# Altium PCB controller_V1.0.PcbDoc (part 3 of 8)
Units mm, origin at the board's own origin, x right, y up, seen from the top; angles counter-clockwise.
Board outline 284.13 x 175.13 mm, 4 copper layers (Top Layer, GND, VCC, Bottom Layer); 496 components, 415 nets, 1682 pads, 750 vias.
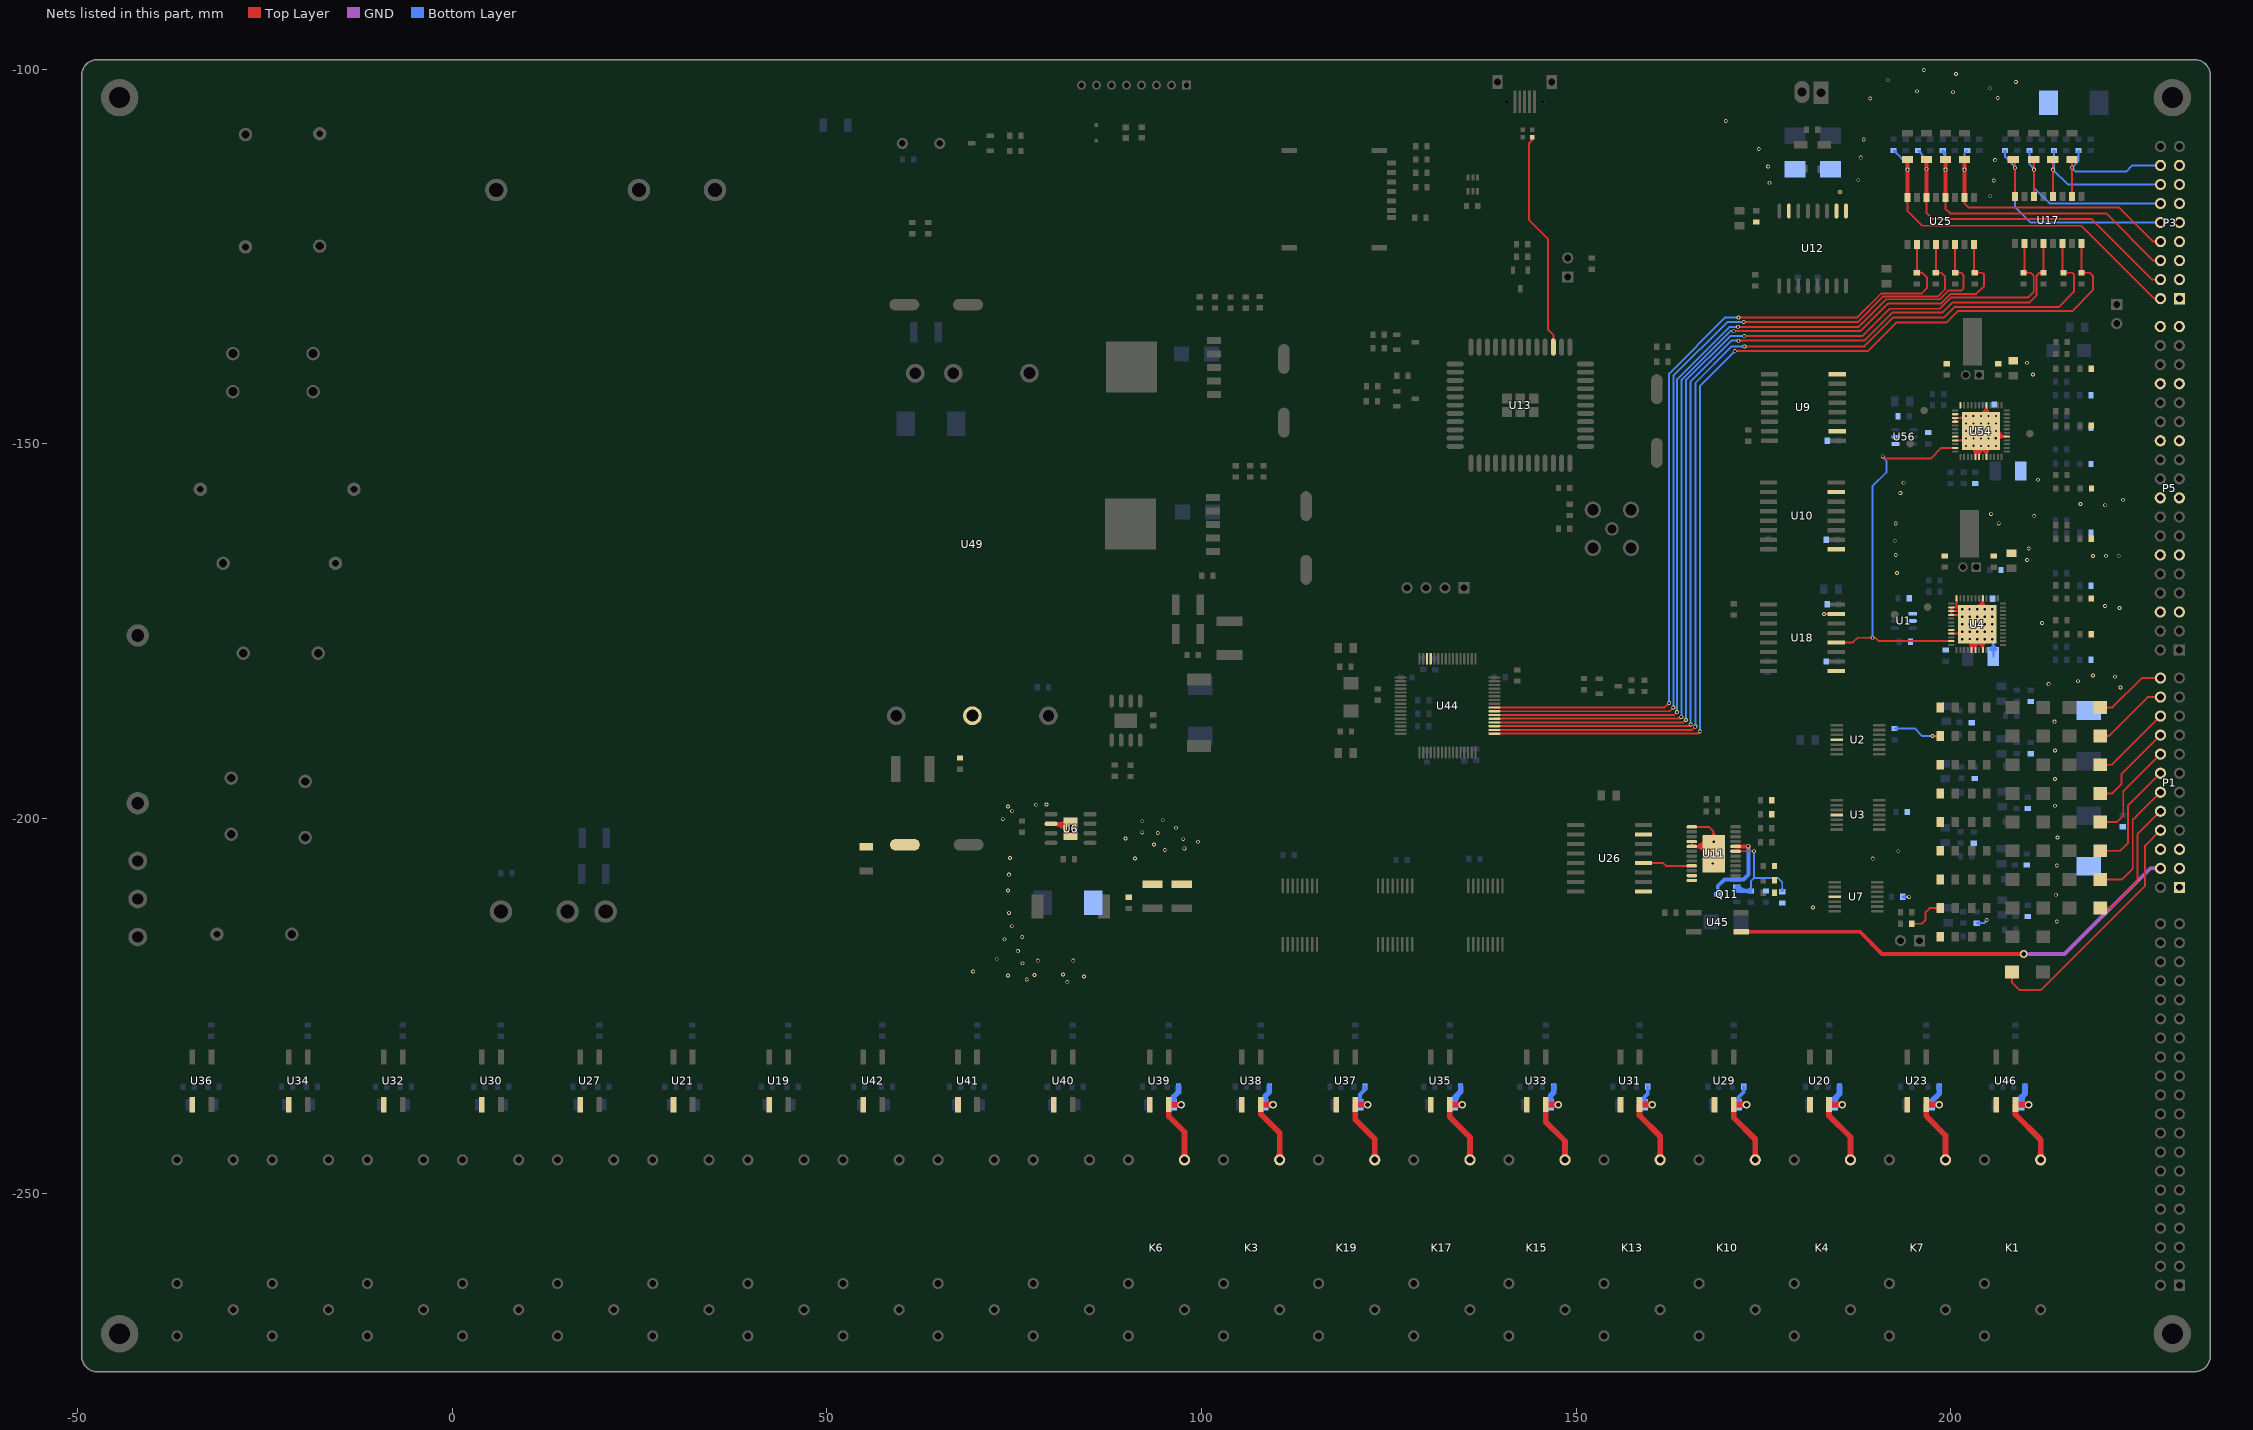
[diagram p5: the nets of this part, all layers, seen from the top]

## Via types
v1: diameter 0.508, hole 0.305, Top Layer to Bottom Layer, tented both sides, 596 vias
v2: diameter 1.016, hole 0.635, Top Layer to Bottom Layer, tented both sides, 65 vias
v3: diameter 0.6, hole 0.3, Top Layer to Bottom Layer, 50 vias
v4: diameter 0.762, hole 0.508, Top Layer to Bottom Layer, tented both sides, 29 vias
v5: diameter 2.032, hole 1.524, Top Layer to Bottom Layer, tented both sides, 4 vias
v6: diameter 3.048, hole 2.032, Top Layer to Bottom Layer, tented both sides, 3 vias
v7: diameter 1.5, hole 1, Top Layer to Bottom Layer, 2 vias
v8: diameter 2.54, hole 1.778, Top Layer to Bottom Layer, tented both sides, 1 vias

## Nets (pads, with @x,y where several pads share a name; then routed paths per layer and width w, separated by ;. In a path a pad name is that pad's centre, name@x,y a point inside that pad or via, vN(x,y) a via of type N, cw(c..) or ccw(c..) an arc to the next point about the centre after c; other vN are vias at no path point) (continued)
AGND: C1.2 C2.1 C6.1 C7.1 C8.1 C16.1 C17.1 C25.1 C26.1 C33.1 C34.1 C36.1 C37.1 C38.2 C39.2 C40.1 C43.2 C46.1 C47.1 C48.2 C49.1 C54.1 C58.1 C59.2 C62.1 C67.2 C68.2 C84.1 C85.1 C86.1 C112.1 C121.1 C133.1 C138.1 C151.2 C153.2 C156.2 C157.1 C159.2 C160.1 C162.2 C164.1 C165.1 C167.1 D4.1 D52.1 D75.1 D76.1 D78.1 D79.1 E13.2 E14.2 E138.2 P1.1 P1.3 P1.5 P1.6 P3.1 P3.3 P3.5 P3.7 P3.9 P3.11 P3.13 P3.15 P5.5 P5.6 P5.11 P5.12 P5.17 P5.18 P5.23 P5.24 P5.29 P5.30 P5.35 P5.36 R6.1 R12.1 R14.1 R18.1 R23.1 R28.1 R33.1 R35.1 R38.1 R71.2 R89.1 R198.1 R199.1 R200.1 R201.1 R210.1 R211.1 R212.1 R213.1 R222.1 R223.1 R224.1 R225.1 U1.1 U1.2 U2.11 U3.11 U4.5 U4.12 U4.14 U4.15 U4.16 U4.20 U4.21 U4.29 U4.30 U4.32 U4.49 U6.6 U6.9 U7.11 U9.2 U9.8 U10.9 U10.15 U11.1 U11.4 U11.5 U11.11 U11.12 U11.25 U12.9 U12.10 U12.15 U18.9 U18.15 U19.3 U20.3 U21.3 U23.3 U26.9 U26.15 U27.3 U29.3 U30.3 U31.3 U32.3 U33.3 U34.3 U35.3 U36.3 U37.3 U38.3 U39.3 U40.3 U41.3 U42.3 U46.3 U49.5 U54.5 U54.12 U54.14 U54.15 U54.16 U54.20 U54.21 U54.29 U54.30 U54.32 U54.41 U54.49 U56.1 U56.2 | length 264.9
  Top Layer w0.254: U6.9@81.887,-200.711 v7(82.522,-201.346) ; U11.5@165.38,-203.654 ccw(c165.212,-203.487) 165.449,-203.487 ccw(c165.686,-203.487) U11.5@165.518,-203.654 ; U11.4@165.38,-203.143 cw(c165.212,-203.31) 165.449,-203.31 cw(c165.686,-203.31) U11.4@165.518,-203.143 ; U11.4@165.449,-203.074 U11.5@165.449,-203.724 ; U11.1@165.449,-201.124 167.697,-201.124 168.374,-201.8 ; U11.5@165.981,-203.724 ccw(c165.981,-201.767) U11.25@167.503,-202.996 ; U11.5@166,-203.724 cw(c166,-205.727) U11.25@167.523,-204.426 ; U11.5@166.018,-203.793 cw(c166.186,-203.96) 166.186,-203.724 cw(c166.186,-203.487) U11.5@166.018,-203.654 ; U11.1@166.018,-201.193 cw(c166.186,-201.36) 166.186,-201.124 cw(c166.186,-200.887) U11.1@166.018,-201.054 ; 166.512,-203.724 ccw(c166.512,-202.196) U11.25@167.701,-203.155 ; 166.551,-203.724 cw(c166.551,-205.256) U11.25@167.716,-204.261 ; U11.25@167.306,-202.836 cw(c165.449,-201.338) U11.5@165.449,-203.724 ; U11.25@167.33,-204.591 ccw(c165.449,-206.198) U11.5@165.449,-203.724 ; U11.25@167.399,-203.724 U11.5@165.449,-203.724 ; U11.25@167.944,-202.395 ccw(c167.748,-201.8) 168.374,-201.8 ; U11.25@168.024,-202.636 ccw(c167.864,-202.152) 168.374,-202.152 ccw(c168.884,-202.152) U11.25@168.724,-202.636 ; v1(168.374,-204.699) 168.374,-201.8 ; U11.25@168.804,-202.395 cw(c169,-201.8) 168.374,-201.8 ; v1(183.083,-172.695) U18.15@184.732,-172.695 ; v1@183.173,-172.784 cw(c183.39,-173.001) 183.39,-172.695 cw(c183.39,-172.388) v1@183.173,-172.605 ; U18.15@183.748,-172.802 ccw(c183.487,-173.063) 183.487,-172.695 ccw(c183.487,-172.327) U18.15@183.748,-172.587 ; R23.1@194.818,-214.046 196.139,-214.046 196.647,-213.538 196.647,-212.496 197.188,-211.956 R35.1@198.625,-211.956 ; R23.1@194.976,-214.203 cw(c195.356,-214.584) 195.356,-214.046 cw(c195.356,-213.507) R23.1@194.976,-213.888 ; v1(197.588,-189) R6.1@198.625,-189 ; v1@197.678,-189.09 cw(c197.894,-189.307) 197.894,-189 cw(c197.894,-188.694) v1@197.678,-188.91 ; R35.1@198.362,-212.219 ccw(c197.725,-212.856) 197.725,-211.956 ccw(c197.725,-211.055) R35.1@198.362,-211.692 ; R6.1@198.362,-189.264 ccw(c197.725,-189.901) 197.725,-189 ccw(c197.725,-188.1) R6.1@198.362,-188.737 ; U4.21@200.095,-175.316 202.295,-175.316 cw(c202.295,-174.613) U4.49@201.693,-174.977 ; 200.524,-175.316 ccw(c200.524,-174.045) U4.49@201.423,-174.944 ; 200.524,-172.816 cw(c200.524,-174.087) U4.49@201.423,-173.189 ; 200.524,-172.316 ccw(c200.524,-171.045) U4.49@201.423,-171.944 ; 200.524,-171.816 cw(c200.524,-173.087) U4.49@201.423,-172.189 ; U54.21@200.603,-149.535 202.803,-149.535 cw(c202.803,-148.832) U54.49@202.201,-149.196 ; U54.16@200.603,-147.035 U54.15@200.603,-146.535 U54.49@202.303,-146.535 ; 200.713,-175.316 cw(c200.713,-176.898) U4.49@201.832,-175.78 ; 200.713,-172.816 ccw(c200.713,-171.234) U4.49@201.832,-172.353 ; 200.795,-171.748 U4.12@200.795,-170.616 ; 201.032,-149.535 ccw(c201.032,-148.264) U54.49@201.931,-149.163 ; 201.032,-146.535 ccw(c201.032,-145.264) U54.49@201.931,-146.163 ; U4.49@201.137,-175.316 ccw(c201.137,-174.658) U4.49@201.602,-175.123 ; U4.49@201.137,-172.816 cw(c201.137,-173.474) U4.49@201.602,-173.009 ; U4.49@201.137,-172.316 ccw(c201.137,-171.658) U4.49@201.602,-172.123 ; U4.49@201.137,-171.816 cw(c201.137,-172.474) U4.49@201.602,-172.009 ; 201.221,-149.535 cw(c201.221,-151.117) U54.49@202.34,-149.999 ; U4.49@201.258,-175.239 ccw(c201.394,-175.157) U4.49@201.394,-175.316 ; U4.49@201.258,-172.893 cw(c201.394,-172.975) U4.49@201.394,-172.816 ; U4.49@201.295,-171.816 U4.14@200.095,-171.816 U4.15@200.095,-172.316 ; U4.49@201.476,-175.108 ccw(c201.845,-174.885) U4.49@201.845,-175.316 ; U4.49@201.476,-173.024 cw(c201.845,-173.247) U4.49@201.845,-172.816 ; U4.49@201.524,-175.316 ccw(c201.524,-174.045) U4.49@202.423,-174.944 ; U4.49@201.524,-172.816 cw(c201.524,-174.087) U4.49@202.423,-173.189 ; U54.49@201.645,-149.535 ccw(c201.645,-148.877) U54.49@202.11,-149.342 ; U54.49@201.645,-146.535 ccw(c201.645,-145.877) U54.49@202.11,-146.342 ; U4.49@201.693,-173.156 cw(c202.295,-173.52) 202.295,-172.816 U4.16@200.095,-172.816 U4.15@200.095,-172.316 ; U4.49@201.75,-175.316 ccw(c201.75,-175.271) U4.49@201.782,-175.303 ; U4.49@201.75,-172.816 cw(c201.75,-172.861) U4.49@201.782,-172.829 ; U4.49@201.75,-172.316 ccw(c201.75,-172.271) U4.49@201.782,-172.303 ; U54.49@201.766,-149.458 ccw(c201.902,-149.376) U54.49@201.902,-149.535 ; U4.49@201.795,-172.316 U4.15@200.095,-172.316 ; U54.49@201.984,-149.327 ccw(c202.353,-149.104) U54.49@202.353,-149.535 ; U4.49@202.011,-175.942 cw(c200.657,-177.597) 202.795,-177.597 cw(c203.923,-177.597) U4.49@203.803,-176.475 ; U54.49@202.032,-149.535 ccw(c202.032,-148.264) U54.49@202.931,-149.163 ; U4.49@202.137,-175.316 ccw(c202.137,-174.658) U4.49@202.602,-175.123 ; U4.49@202.137,-172.816 cw(c202.137,-173.474) U4.49@202.602,-173.009 ; U4.49@202.172,-175.745 cw(c201.095,-177.061) 202.795,-177.061 ; U54.49@202.258,-149.535 ccw(c202.258,-149.49) U54.49@202.29,-149.522 ; U54.49@202.258,-146.535 ccw(c202.258,-146.49) U54.49@202.29,-146.522 ; U4.49@202.332,-175.548 cw(c201.534,-176.525) U4.49@202.795,-176.525 ; U4.49@202.423,-176.159 cw(c201.524,-177.057) 202.795,-177.057 ; U4.49@202.423,-175.914 ccw(c201.524,-175.015) U4.49@202.795,-175.015 ; U4.49@202.423,-175.189 cw(c201.524,-176.087) U4.49@202.795,-176.087 ; U4.49@202.493,-176.249 cw(c201.879,-177.525) 203.295,-177.525 cw(c204.447,-177.525) U4.49@204.156,-176.411 ; U54.49@202.519,-150.161 cw(c201.165,-151.816) 203.303,-151.816 cw(c204.431,-151.816) U54.49@204.311,-150.694 ; U4.49@202.545,-174.893 ccw(c202.545,-174.476) 202.84,-174.771 ccw(c203.136,-175.066) U4.49@202.718,-175.066 ; U4.49@202.602,-176.093 ccw(c202.137,-175.628) U4.49@202.795,-175.628 ; U4.49@202.602,-175.979 cw(c202.137,-176.444) U4.49@202.795,-176.444 ; U4.49@202.602,-175.009 cw(c202.137,-175.474) U4.49@202.795,-175.474 ; U4.49@202.604,-176.02 cw(c202.073,-177.121) U4.30@203.295,-177.121 ; U54.49@202.645,-149.535 ccw(c202.645,-148.877) U54.49@203.11,-149.342 ; U54.49@202.68,-149.964 cw(c201.603,-151.28) 203.303,-151.28 ; U4.49@202.714,-175.791 cw(c202.268,-176.716) 203.295,-176.716 ; U4.49@202.782,-176.273 ccw(c202.75,-176.241) U4.49@202.795,-176.241 ; U4.49@202.782,-175.799 cw(c202.75,-175.831) U4.49@202.795,-175.831 ; U4.49@202.782,-174.829 cw(c202.75,-174.861) U4.49@202.795,-174.861 ; U4.29@202.795,-177.516 202.795,-174.816 v3(203.545,-174.066) ; U4.29@202.795,-177.314 cw(c203.892,-177.314) U4.49@203.776,-176.223 ; 202.795,-177.031 cw(c203.862,-177.031) U4.49@203.749,-175.97 ; 202.795,-176.749 cw(c203.832,-176.749) U4.49@203.722,-175.718 ; U54.49@202.84,-149.767 cw(c202.042,-150.744) U54.49@203.303,-150.744 ; U54.49@202.931,-150.378 cw(c202.032,-151.276) 203.303,-151.276 ; U54.49@202.931,-150.133 ccw(c202.032,-149.234) U54.49@203.303,-149.234 ; U54.49@202.931,-149.408 cw(c202.032,-150.306) U54.49@203.303,-150.306 ; U54.49@203.001,-150.468 cw(c202.387,-151.744) 203.803,-151.744 cw(c204.955,-151.744) U54.49@204.664,-150.63 ; U54.49@203.11,-150.312 ccw(c202.645,-149.847) U54.49@203.303,-149.847 ; U54.49@203.11,-150.198 cw(c202.645,-150.663) U54.49@203.303,-150.663 ; U54.49@203.11,-149.228 cw(c202.645,-149.693) U54.49@203.303,-149.693 ; U54.49@203.112,-150.239 cw(c202.581,-151.34) U54.30@203.803,-151.34 ; U54.49@203.222,-150.01 cw(c202.776,-150.935) 203.803,-150.935 ; U4.49@203.287,-176.475 cw(c203.167,-177.597) 204.295,-177.597 cw(c206.433,-177.597) U4.49@205.079,-175.942 ; U54.49@203.29,-150.492 ccw(c203.258,-150.46) U54.49@203.303,-150.46 ; U54.49@203.29,-150.018 cw(c203.258,-150.05) U54.49@203.303,-150.05 ; U54.49@203.29,-149.048 cw(c203.258,-149.08) U54.49@203.303,-149.08 ; U4.30@203.295,-177.516 203.295,-174.316 ccw(c203.998,-174.316) U4.49@203.634,-174.918 ; U4.30@203.295,-177.196 cw(c204.361,-177.196) U4.49@204.092,-176.165 ; 203.295,-177.087 cw(c204.566,-177.087) U4.49@203.667,-176.189 ; 203.295,-176.868 cw(c204.275,-176.868) U4.49@204.028,-175.919 ; U4.49@203.295,-176.474 cw(c203.953,-176.474) U4.49@203.488,-176.009 ; U4.49@203.295,-176.271 ccw(c203.34,-176.271) U4.49@203.308,-176.303 ; U4.49@203.295,-176.087 cw(c204.566,-176.087) U4.49@203.667,-175.189 ; U4.49@203.295,-175.861 cw(c203.34,-175.861) U4.49@203.308,-175.829 ; U4.49@203.295,-175.658 ccw(c203.953,-175.658) U4.49@203.488,-176.123 ; U4.49@203.295,-175.474 cw(c203.953,-175.474) U4.49@203.488,-175.009 ; U4.49@203.295,-175.217 ccw(c203.454,-175.217) U4.49@203.372,-175.353 ; U4.49@203.295,-175.087 cw(c204.566,-175.087) U4.49@203.667,-174.189 ; U4.49@203.295,-175.045 ccw(c204.566,-175.045) U4.49@203.667,-175.944 ; U4.49@203.295,-174.861 cw(c203.34,-174.861) U4.49@203.308,-174.829 ; U4.49@203.295,-174.767 ccw(c203.726,-174.767) U4.49@203.503,-175.136 ; U4.49@203.295,-174.474 cw(c203.953,-174.474) U4.49@203.488,-174.009 ; U54.29@203.303,-151.735 U54.49@203.303,-149.035 ; U54.29@203.303,-151.533 cw(c204.4,-151.533) U54.49@204.284,-150.442 ; 203.303,-151.25 cw(c204.37,-151.25) U54.49@204.257,-150.189 ; 203.303,-150.968 cw(c204.34,-150.968) U54.49@204.23,-149.937 ; U4.49@203.314,-176.223 cw(c203.198,-177.314) U4.32@204.295,-177.314 ; U4.49@203.341,-175.97 cw(c203.228,-177.031) 204.295,-177.031 ; U4.49@203.343,-171.652 ccw(c203.256,-170.616) U4.5@204.295,-170.616 ccw(c206.265,-170.616) U4.49@205.045,-172.164 ; U4.49@203.364,-171.905 ccw(c203.279,-170.892) U4.5@204.295,-170.892 ; U4.49@203.368,-175.718 cw(c203.258,-176.749) 204.295,-176.749 ; U4.49@203.372,-174.066 cw(c202.954,-174.066) 203.25,-174.362 cw(c203.545,-174.657) U4.49@203.545,-174.239 ; U4.49@203.385,-172.158 ccw(c203.302,-171.169) 204.295,-171.169 ; U4.49@203.406,-172.411 ccw(c203.325,-171.445) 204.295,-171.445 ; U54.49@203.795,-150.694 cw(c203.675,-151.816) 204.803,-151.816 cw(c206.941,-151.816) U54.49@205.587,-150.161 ; U54.30@203.803,-151.735 203.803,-148.535 ccw(c204.506,-148.535) U54.49@204.142,-149.137 ; U54.30@203.803,-151.415 cw(c204.869,-151.415) U54.49@204.6,-150.384 ; 203.803,-151.306 cw(c205.074,-151.306) U54.49@204.175,-150.408 ; 203.803,-151.087 cw(c204.783,-151.087) U54.49@204.536,-150.138 ; U54.49@203.803,-150.693 cw(c204.461,-150.693) U54.49@203.996,-150.228 ; U54.49@203.803,-150.49 ccw(c203.848,-150.49) U54.49@203.816,-150.522 ; U54.49@203.803,-150.306 cw(c205.074,-150.306) U54.49@204.175,-149.408 ; U54.49@203.803,-150.08 cw(c203.848,-150.08) U54.49@203.816,-150.048 ; U54.49@203.803,-149.877 ccw(c204.461,-149.877) U54.49@203.996,-150.342 ; U54.49@203.803,-149.693 cw(c204.461,-149.693) U54.49@203.996,-149.228 ; U54.49@203.803,-149.436 ccw(c203.962,-149.436) U54.49@203.88,-149.572 ; U54.49@203.803,-149.306 cw(c205.074,-149.306) U54.49@204.175,-148.408 ; U54.49@203.803,-149.264 ccw(c205.074,-149.264) U54.49@204.175,-150.163 ; U54.49@203.803,-149.08 cw(c203.848,-149.08) U54.49@203.816,-149.048 ; U54.49@203.803,-148.986 ccw(c204.234,-148.986) U54.49@204.011,-149.355 ; U54.49@203.803,-148.693 cw(c204.461,-148.693) U54.49@203.996,-148.228 ; U54.49@203.822,-150.442 cw(c203.706,-151.533) U54.32@204.803,-151.533 ; U54.49@203.849,-150.189 cw(c203.736,-151.25) 204.803,-151.25 ; U54.49@203.851,-145.871 ccw(c203.764,-144.835) U54.5@204.803,-144.835 ccw(c206.773,-144.835) U54.49@205.553,-146.383 ; U54.49@203.872,-146.124 ccw(c203.787,-145.111) U54.5@204.803,-145.111 ; U54.49@203.876,-149.937 cw(c203.766,-150.968) 204.803,-150.968 ; U54.49@203.893,-146.377 ccw(c203.81,-145.388) 204.803,-145.388 ; U54.49@203.914,-146.63 ccw(c203.833,-145.664) 204.803,-145.664 ; v3(204.053,-148.285) 204.803,-147.535 U54.5@204.803,-144.835 ; U54.49@204.053,-148.112 ccw(c204.053,-147.695) 204.348,-147.99 ccw(c204.644,-148.285) U54.49@204.226,-148.285 ; U4.32@204.295,-177.516 U4.49@204.295,-174.816 ; 204.295,-177.087 cw(c205.566,-177.087) U4.49@204.667,-176.189 ; 204.295,-177.061 cw(c205.995,-177.061) U4.49@204.918,-175.745 ; U4.49@204.295,-176.525 cw(c205.556,-176.525) U4.49@204.758,-175.548 ; U4.49@204.295,-176.474 cw(c204.953,-176.474) U4.49@204.488,-176.009 ; U4.49@204.295,-176.271 ccw(c204.34,-176.271) U4.49@204.308,-176.303 ; U4.49@204.295,-176.087 cw(c205.566,-176.087) U4.49@204.667,-175.189 ; U4.49@204.295,-175.861 cw(c204.34,-175.861) U4.49@204.308,-175.829 ; U4.49@204.295,-175.658 ccw(c204.953,-175.658) U4.49@204.488,-176.123 ; U4.49@204.295,-175.474 cw(c204.953,-175.474) U4.49@204.488,-175.009 ; U4.49@204.295,-175.045 ccw(c205.566,-175.045) U4.49@204.667,-175.944 ; U4.49@204.295,-174.861 cw(c204.34,-174.861) U4.49@204.308,-174.829 ; U4.49@204.295,-173.316 U4.5@204.295,-170.616 ; U4.49@204.295,-173.271 ccw(c204.34,-173.271) U4.49@204.308,-173.303 ; U4.49@204.295,-173.087 cw(c205.566,-173.087) U4.49@204.667,-172.189 ; U4.49@204.295,-172.658 ccw(c204.953,-172.658) U4.49@204.488,-173.123 ; U4.49@204.295,-172.474 cw(c204.953,-172.474) U4.49@204.488,-172.009 ; U4.49@204.295,-172.271 ccw(c204.34,-172.271) U4.49@204.308,-172.303 ; U4.49@204.295,-172.045 ccw(c205.566,-172.045) U4.49@204.667,-172.944 ; U4.49@204.295,-171.861 cw(c204.34,-171.861) U4.49@204.308,-171.829 ; U4.49@204.295,-171.658 ccw(c204.953,-171.658) U4.49@204.488,-172.123 ; 204.295,-171.14 ccw(c205.852,-171.14) U4.49@204.888,-172.363 ; 204.295,-171.045 ccw(c205.566,-171.045) U4.49@204.667,-171.944 ; U54.32@204.803,-151.735 204.803,-149.285 ccw(c206.023,-149.285) U54.49@205.173,-150.161 ; 204.803,-151.306 cw(c206.074,-151.306) U54.49@205.175,-150.408 ; 204.803,-151.28 cw(c206.503,-151.28) U54.49@205.426,-149.964 ; U54.49@204.803,-150.744 cw(c206.064,-150.744) U54.49@205.266,-149.767 ; U54.49@204.803,-150.693 cw(c205.461,-150.693) U54.49@204.996,-150.228 ; U54.49@204.803,-150.486 ccw(c204.858,-150.486) U54.49@204.82,-150.526 ; U54.49@204.803,-150.306 cw(c206.074,-150.306) 205.175,-149.408 cw(c206.074,-150.306) U54.49@206.074,-149.035 ; U54.49@204.803,-150.08 cw(c204.848,-150.08) U54.49@204.816,-150.048 ; U54.49@204.803,-149.886 ccw(c205.441,-149.886) U54.49@204.997,-150.343 ; U54.49@204.803,-149.693 cw(c205.461,-149.693) 204.996,-149.228 cw(c205.461,-149.693) U54.49@205.461,-149.035 ; U54.49@204.803,-149.035 U54.41@207.503,-149.035 ; U54.49@204.803,-147.49 ccw(c204.848,-147.49) U54.49@204.816,-147.522 ; U54.49@204.803,-147.306 cw(c206.074,-147.306) U54.49@205.175,-146.408 ; U54.49@204.803,-146.877 ccw(c205.461,-146.877) U54.49@204.996,-147.342 ; U54.49@204.803,-146.693 cw(c205.461,-146.693) U54.49@204.996,-146.228 ; U54.49@204.803,-146.49 ccw(c204.848,-146.49) U54.49@204.816,-146.522 ; U54.49@204.803,-146.264 ccw(c206.074,-146.264) U54.49@205.175,-147.163 ; U54.49@204.803,-146.08 cw(c204.848,-146.08) U54.49@204.816,-146.048 ; U54.49@204.803,-145.877 ccw(c205.461,-145.877) U54.49@204.996,-146.342 ; 204.803,-145.359 ccw(c206.36,-145.359) U54.49@205.396,-146.582 ; 204.803,-145.264 ccw(c206.074,-145.264) U54.49@205.175,-146.163 ; U54.49@204.816,-149.048 cw(c204.848,-149.08) U54.49@204.848,-149.035 ; U54.49@204.88,-147.285 cw(c204.462,-147.285) 204.758,-147.581 cw(c205.053,-147.876) U54.49@205.053,-147.458 ; U54.49@205.074,-149.035 cw(c205.074,-150.204) U54.49@205.901,-149.378 ; U54.49@205.687,-149.035 cw(c205.687,-149.591) U54.49@206.08,-149.198 ; U54.49@205.708,-148.147 ccw(c206.674,-148.066) 206.674,-149.035 ; U54.49@205.756,-149.628 cw(c206.979,-150.593) 206.979,-149.035 ; U54.49@205.956,-149.786 cw(c207.503,-151.006) U54.41@207.503,-149.035 ; U54.49@205.961,-148.125 ccw(c206.951,-148.042) 206.951,-149.035 ; U54.49@205.966,-149.198 cw(c206.359,-149.591) U54.49@206.359,-149.035 ; U54.49@206.145,-149.378 cw(c206.972,-150.204) 206.972,-149.035 ; U54.49@206.214,-148.104 ccw(c207.227,-148.019) U54.41@207.227,-149.035 ; U54.49@206.468,-148.083 ccw(c207.503,-147.996) U54.41@207.503,-149.035
  Top Layer w0.508: U6.6@80.637,-200.711 cw(c80.637,-202.681) U6.9@82.03,-201.288 ; 81.047,-200.711 ccw(c81.047,-199.321) U6.9@82.03,-200.304 ; 81.09,-200.711 cw(c81.09,-202.68) U6.9@82.531,-201.338 ; U6.9@81.887,-200.711 U6.6@79.922,-200.711 cw(c79.922,-203.769) U6.9@82.159,-201.684
  Bottom Layer w0.254: C49.1@192.507,-187.985 195.224,-187.985 196.239,-189 v1(197.588,-189) ; C49.1@192.739,-188.143 cw(c193.12,-188.524) 193.12,-187.985 cw(c193.12,-187.447) C49.1@192.739,-187.828 ; C58.1@193.599,-210.464 v1(194.462,-210.464) ; C58.1@193.756,-210.622 cw(c194.137,-211.003) 194.137,-210.464 cw(c194.137,-209.926) C58.1@193.756,-210.307 ; v1@194.373,-210.554 ccw(c194.156,-210.771) 194.156,-210.464 ccw(c194.156,-210.158) v1@194.373,-210.375 ; v1@197.498,-189.09 ccw(c197.281,-189.307) 197.281,-189 ccw(c197.281,-188.694) v1@197.498,-188.91 ; C34.1@203.479,-213.97 204.495,-213.97 v1@204.902,-213.563 ; C34.1@203.712,-214.127 cw(c204.093,-214.508) 204.093,-213.97 cw(c204.093,-213.431) C34.1@203.712,-213.812 ; 204.546,-213.919 ccw(c204.191,-213.563) v1@204.694,-213.563 ; E14.2@205.255,-177.427 ccw(c204.171,-176.343) 205.704,-176.343 ccw(c207.237,-176.343) E14.2@206.153,-177.427 ; v3@205.423,-176.189 cw(c204.743,-176.868) 205.704,-176.868 ; E14.2@205.435,-177.607 ccw(c204.784,-176.956) 205.704,-176.956 ccw(c206.624,-176.956) E14.2@205.973,-177.607 ; v3(205.545,-176.066) 205.704,-176.225 E14.2@205.704,-178.384
  other v1: 82.093,-221.844 76.683,-221.488 84.328,-221.082 74.168,-220.955 77.699,-220.878 81.509,-220.828 69.52,-220.421 76.098,-219.329 78.156,-218.973 82.88,-218.973 72.669,-218.719 75.489,-217.703 73.711,-216.129 76.073,-215.824 74.727,-214.376 214.173,-213.741 204.821,-213.563 74.32,-212.598 181.635,-211.887 214.046,-210.185 74.168,-209.601 74.295,-207.493 214.173,-206.273 168.25,-205.994 189.611,-205.359 91.135,-205.334 74.447,-205.283 193.015,-204.368 95.098,-204.216 97.714,-203.987 93.65,-203.479 99.543,-203.098 168.374,-203.098 97.561,-202.717 89.865,-202.667 214.274,-202.54 94.158,-201.93 92.1,-201.854 96.596,-201.244 92.1,-200.381 94.818,-200.228 73.482,-200.05 74.727,-199.034 74.168,-198.399 213.944,-198.298 77.927,-198.171 79.324,-198.145 213.944,-194.716 213.944,-190.932 213.868,-187.071 222.682,-182.524 213.081,-182.067 216.992,-181.686 221.945,-181.077 218.999,-180.924 212.217,-173.914 222.555,-171.907 220.624,-171.628 192.837,-167.234 210.21,-165.481 218.999,-164.973 220.726,-164.922 222.453,-164.922 192.684,-164.821 210.439,-163.957 192.532,-162.916 192.684,-160.63 206.426,-160.604 211.176,-159.639 205.41,-159.334 220.624,-158.191 217.348,-158.013 223.012,-157.455 193.294,-156.566 193.726,-155.194 211.658,-154.788 210.998,-140.741 210.185,-139.167 205.283,-116.942 185.242,-116.383 175.819,-115.138 205.765,-114.833 187.681,-114.808 175.641,-112.979 205.943,-112.116 188.011,-111.785 174.396,-110.642 188.392,-109.372 169.977,-106.909 189.281,-103.886 206.299,-103.835 200.304,-103.048 195.504,-102.921 205.232,-102.514 208.712,-101.702 191.618,-101.448 200.711,-100.635 196.418,-100.101
  other v3: 201.545,-176.066 203.545,-176.066 204.545,-176.066 202.545,-176.036 201.545,-175.066 202.545,-175.066 203.545,-175.066 204.545,-175.066 205.515,-175.036 201.545,-174.066 202.545,-174.066 204.545,-174.066 205.545,-174.066 201.545,-173.066 202.545,-173.066 203.545,-173.066 204.545,-173.066 205.545,-173.066 201.545,-172.066 202.515,-172.066 203.545,-172.066 204.545,-172.066 205.545,-172.066 202.053,-150.285 204.053,-150.285 205.053,-150.285 206.053,-150.285 203.053,-150.255 202.053,-149.285 203.053,-149.285 204.053,-149.285 205.053,-149.285 206.023,-149.255 202.053,-148.285 203.053,-148.285 205.053,-148.285 206.053,-148.285 202.053,-147.285 203.053,-147.285 204.053,-147.285 205.053,-147.285 206.053,-147.285 202.053,-146.285 203.023,-146.285 204.053,-146.285 205.053,-146.285 206.053,-146.285
AI0: D1.1 P1.24 | length 9.7
  Top Layer w0.254: D1.1@219.979,-185.174 221.607,-185.174 225.527,-181.254 P1.24@228.006,-181.254
AI1: D2.1 P1.22 | length 11.1
  Top Layer w0.254: D2.1@219.979,-189 221.083,-189 ; D2.1@220.735,-189.245 cw(c221.083,-189.37) 221.083,-189 ; D2.1@220.735,-188.756 ccw(c221.083,-188.631) 221.083,-189 ; P1.22@228.006,-183.794 226.289,-183.794 221.083,-189
AI2: D5.1 P1.20 | length 10.7
  Top Layer w0.254: D5.1@219.979,-192.826 221.515,-192.826 P1.20@228.006,-186.334
AI3: D7.1 P1.18 | length 12
  Top Layer w0.254: D7.1@219.979,-196.652 221.559,-196.652 222.783,-195.428 222.783,-194.097 P1.18@228.006,-188.874
AI4: D10.1 P1.16 | length 13.7
  Top Layer w0.254: D10.1@219.979,-200.478 222.178,-200.478 223.037,-199.619 223.037,-196.383 P1.16@228.006,-191.414
AI5: D13.1 P1.14 | length 15.3
  Top Layer w0.254: D13.1@219.979,-204.304 222.67,-204.304 223.672,-203.302 223.672,-198.288 P1.14@228.006,-193.954
AI6: D16.1 P1.12 | length 16.7
  Top Layer w0.254: D16.1@219.979,-208.13 222.908,-208.13 224.307,-206.731 224.307,-200.193 224.688,-199.812 224.849,-199.652 P1.12@228.006,-196.494
AI7: D18.1 P1.10 | length 19.8
  Top Layer w0.254: D18.1@219.979,-211.956 221.368,-211.956 ; D18.1@220.451,-212.207 cw(c220.907,-212.496) 220.907,-211.956 cw(c220.907,-211.415) D18.1@220.451,-211.705 ; D18.1@220.665,-212.343 cw(c221.368,-212.788) 221.368,-211.956 ; D18.1@220.665,-211.569 ccw(c221.368,-211.123) 221.368,-211.956 ; P1.10@228.006,-199.034 224.942,-202.098 224.942,-208.382 221.368,-211.956
AI8: D20.1 P1.8 | length 33.6
  Top Layer w0.254: D20.1@208.211,-220.497 208.211,-221.902 209.22,-222.91 212.032,-222.91 225.958,-208.984 225.958,-203.622 P1.8@228.006,-201.574
AO_0: P1.4 U45.3 | length 63.8
  Top Layer w0.508: U45.3@172.057,-215.113 187.884,-215.113 190.856,-218.084 v2(209.753,-218.084) ; v2@209.574,-218.264 ccw(c209.14,-218.698) 209.14,-218.084 ccw(c209.14,-217.471) v2@209.574,-217.905
  GND w0.508: v2(209.753,-218.084) 215.214,-218.084 226.644,-206.654 P1.4@228.006,-206.654 ; v2@209.933,-218.264 cw(c210.366,-218.698) 210.366,-218.084 cw(c210.366,-217.471) v2@209.933,-217.905
AO_BOOST: Q11.3 U11.20 | length 11.3
  Top Layer w0.508: U11.20@171.299,-203.724 v1(172.999,-203.724)
  Bottom Layer w0.508: Q11.3@168.922,-210.144 168.922,-209.03 169.824,-208.128 172.364,-208.128 172.999,-207.493 v1(172.999,-203.724)
AO_IOUT: C40.2 Q11.1 R72.1 U11.19 | length 20.9
  Top Layer w0.254: U11.19@171.299,-204.374 v1(173.756,-204.374) ; U11.19@171.868,-204.443 cw(c172.036,-204.61) 172.036,-204.374 cw(c172.036,-204.137) U11.19@171.868,-204.304 ; v1@173.666,-204.463 ccw(c173.45,-204.68) 173.45,-204.374 ccw(c173.45,-204.067) v1@173.666,-204.284
  Bottom Layer w0.254: R72.1@173.169,-209.518 ccw(c172.789,-209.137) 173.327,-209.137 ccw(c173.865,-209.137) R72.1@173.485,-209.518 ; R72.1@173.327,-209.676 173.327,-208.359 173.756,-207.93 ; v1@173.666,-204.463 cw(c173.45,-204.68) 173.756,-204.68 cw(c174.063,-204.68) v1@173.846,-204.463 ; v1(173.756,-204.374) 173.756,-207.93 ; C40.2@177.36,-209.621 ccw(c176.98,-209.24) 177.518,-209.24 ccw(c178.056,-209.24) C40.2@177.676,-209.621 ; C40.2@177.518,-209.779 177.518,-208.506 176.942,-207.93 173.756,-207.93
  Bottom Layer w0.508: 171.295,-209.47 ccw(c171.791,-208.975) 171.791,-209.676 ; Q11.1@171.422,-209.144 171.954,-209.676 R72.1@173.327,-209.676 ; Q11.1@171.655,-209.111 ccw(c173.017,-207.748) R72.1@173.017,-209.676 ; Q11.1@171.668,-209.144 ccw(c172.262,-209.144) 171.842,-209.564
DI_0: C108.2 D15.1 P3.8 U25.2 | length 39.9
  Top Layer w0.254: U25.2@201.677,-117.504 cw(c201.367,-117.876) 201.851,-117.876 ; U25.2@201.851,-117.094 201.851,-117.876 ; U25.2@202.026,-117.504 ccw(c202.335,-117.876) 201.851,-117.876 ; P3.8@227.448,-123.243 ccw(c227.051,-123.423) 227.051,-122.987 ; P3.8@227.448,-122.73 cw(c227.051,-122.551) 227.051,-122.987 ; P3.8@228.016,-122.987 227.051,-122.987 ; 201.851,-117.876 202.441,-118.466 222.529,-118.466 227.051,-122.987
  Top Layer w0.508: D15.1@201.715,-112.175 cw(c201.381,-112.51) 201.854,-112.51 cw(c202.327,-112.51) D15.1@201.992,-112.175 ; U25.2@201.854,-117.091 D15.1@201.854,-112.037
  Bottom Layer w0.254: v1@201.764,-113.296 ccw(c201.547,-113.079) 201.854,-113.079 ccw(c202.16,-113.079) v1@201.944,-113.296 ; v1(201.854,-113.386) 201.854,-111.166 C108.2@202.199,-110.822
DI_1: C56.2 D39.1 P3.6 U25.4 | length 46.2
  Top Layer w0.254: U25.4@199.118,-117.487 cw(c198.652,-117.953) 199.311,-117.953 cw(c199.97,-117.953) U25.4@199.504,-117.487 ; U25.4@199.311,-117.094 199.311,-118.615 199.923,-119.228 220.751,-119.228 227.051,-125.527 ; P3.6@227.448,-125.783 ccw(c227.051,-125.963) 227.051,-125.527 ; P3.6@227.448,-125.27 cw(c227.051,-125.091) 227.051,-125.527 ; P3.6@228.016,-125.527 227.051,-125.527
  Top Layer w0.508: D39.1@199.175,-112.175 cw(c198.841,-112.51) 199.314,-112.51 cw(c199.787,-112.51) D39.1@199.452,-112.175 ; U25.4@199.314,-117.091 D39.1@199.314,-112.037
  Bottom Layer w0.254: C56.2@198.843,-110.979 cw(c197.706,-112.116) 199.314,-112.116 ; C56.2@198.926,-110.822 199.314,-111.21 v1(199.314,-113.386) ; C56.2@199.022,-110.8 cw(c198.319,-111.503) 199.314,-111.503 ; v1@199.224,-113.296 ccw(c199.007,-113.079) 199.314,-113.079 ccw(c199.62,-113.079) v1@199.404,-113.296
DI_2: C63.2 D41.1 P3.4 U25.6 | length 47.8
  Top Layer w0.254: U25.6@196.578,-117.487 cw(c196.112,-117.953) 196.771,-117.953 cw(c197.43,-117.953) U25.6@196.964,-117.487 ; U25.6@196.771,-117.094 196.771,-119.123 197.637,-119.99 218.846,-119.99 226.924,-128.067 P3.4@228.016,-128.067
  Top Layer w0.508: D41.1@196.635,-112.175 cw(c196.301,-112.51) 196.774,-112.51 cw(c197.247,-112.51) D41.1@196.912,-112.175 ; U25.6@196.774,-117.091 D41.1@196.774,-112.037
  Bottom Layer w0.254: C63.2@195.653,-110.822 195.653,-110.864 196.774,-111.985 v1(196.774,-113.259) ; C63.2@195.951,-110.822 ccw(c196.772,-110.822) 196.191,-111.403 ; v1@196.684,-113.169 ccw(c196.467,-112.952) 196.774,-112.952 ccw(c197.08,-112.952) v1@196.864,-113.169
DI_3: C65.2 D43.1 P3.2 U25.8 | length 51.9
  Top Layer w0.254: U25.8@194.038,-117.487 cw(c193.572,-117.953) 194.231,-117.953 cw(c194.89,-117.953) U25.8@194.424,-117.487 ; U25.8@194.231,-117.094 194.231,-118.869 196.24,-120.879 217.449,-120.879 227.178,-130.607 P3.2@228.016,-130.607
  Top Layer w0.508: D43.1@194.095,-112.175 cw(c193.761,-112.51) 194.234,-112.51 cw(c194.707,-112.51) D43.1@194.372,-112.175 ; U25.8@194.234,-117.091 D43.1@194.234,-112.037
  Bottom Layer w0.254: C65.2@192.38,-110.822 194.234,-112.676 v1(194.234,-113.386) ; C65.2@192.455,-111.045 cw(c192.455,-111.402) C65.2@192.707,-111.149 ; C65.2@192.678,-110.822 ccw(c193.397,-110.822) 192.888,-111.33 ; v1@194.144,-113.296 ccw(c193.927,-113.079) 194.234,-113.079 ccw(c194.54,-113.079) v1@194.324,-113.296
DI_4: C76.2 D45.1 P3.16 U17.2 | length 29.7
  Top Layer w0.254: D45.1@215.957,-112.265 cw(c215.366,-112.857) 216.202,-112.857 ; U17.2@216.009,-116.574 ccw(c215.543,-116.108) 216.202,-116.108 ccw(c216.861,-116.108) U17.2@216.395,-116.574 ; v1@216.112,-113.221 cw(c215.896,-113.438) 216.202,-113.438 cw(c216.509,-113.438) v1@216.292,-113.221 ; v1@216.112,-113.042 ccw(c215.896,-112.825) 216.202,-112.825 ccw(c216.509,-112.825) v1@216.292,-113.042 ; D45.1@216.186,-112.037 216.202,-112.053 v1(216.202,-113.132) U17.2@216.202,-116.967 ; 216.202,-112.776 cw(c216.925,-112.776) D45.1@216.414,-112.265
  Bottom Layer w0.254: v1@216.202,-113.259 cw(c216.202,-113.565) 216.419,-113.348 cw(c216.636,-113.132) 216.329,-113.132 cw(c216.636,-113.132) 216.419,-112.915 cw(c216.202,-112.698) v1@216.202,-113.005 ; C76.2@216.903,-110.979 cw(c216.523,-111.36) 217.061,-111.36 cw(c217.6,-111.36) C76.2@217.219,-110.979 ; C76.2@217.061,-110.822 217.061,-112.273 v1(216.202,-113.132) 216.71,-113.64 217.068,-113.64 ; 221.767,-113.64 217.068,-113.64 ; P3.16@228.016,-112.827 224.241,-112.827 223.428,-113.64 217.068,-113.64
DI_5: C78.2 D46.1 P3.14 U17.4 | length 28
  Top Layer w0.254: D46.1@213.415,-112.265 cw(c212.819,-112.862) 213.662,-112.862 ; U17.4@213.469,-116.574 ccw(c213.003,-116.108) 213.662,-116.108 ccw(c214.321,-116.108) U17.4@213.855,-116.574 ; v1@213.572,-113.475 cw(c213.356,-113.692) 213.662,-113.692 cw(c213.969,-113.692) v1@213.752,-113.475 ; v1@213.572,-113.296 ccw(c213.356,-113.079) 213.662,-113.079 ccw(c213.969,-113.079) v1@213.752,-113.296 ; D46.1@213.644,-112.037 213.662,-112.055 v1(213.662,-113.386) U17.4@213.662,-116.967 ; 213.662,-112.772 cw(c214.378,-112.772) D46.1@213.872,-112.265
  Bottom Layer w0.254: v1@213.572,-113.296 ccw(c213.034,-112.757) 213.795,-112.757 ; C78.2@213.638,-110.979 cw(c213.257,-111.36) 213.795,-111.36 cw(c214.334,-111.36) C78.2@213.953,-110.979 ; v1@213.662,-113.513 cw(c213.662,-113.819) 213.879,-113.602 cw(c214.096,-113.386) v1@213.789,-113.386 ; v1(213.662,-113.386) 215.643,-115.367 P3.14@228.016,-115.367 ; v1@213.662,-113.259 213.795,-113.125 ; v1@213.771,-113.32 cw(c213.908,-113.238) 213.795,-113.125 ; C78.2@213.795,-110.822 213.795,-113.125
DI_6: C79.2 D47.1 P3.12 U17.6 | length 32.8
  Top Layer w0.254: D47.1@210.873,-112.265 cw(c210.272,-112.867) 211.122,-112.867 ; U17.6@210.929,-116.574 ccw(c210.463,-116.108) 211.122,-116.108 ccw(c211.781,-116.108) U17.6@211.315,-116.574 ; v1@211.032,-113.475 cw(c210.816,-113.692) 211.122,-113.692 cw(c211.429,-113.692) v1@211.212,-113.475 ; v1@211.032,-113.296 ccw(c210.816,-113.079) 211.122,-113.079 ccw(c211.429,-113.079) v1@211.212,-113.296 ; D47.1@211.101,-112.037 211.122,-112.058 v1(211.122,-113.386) U17.6@211.122,-116.967 ; 211.122,-112.767 cw(c211.831,-112.767) D47.1@211.33,-112.265
  Bottom Layer w0.254: C79.2@210.372,-110.979 cw(c209.991,-111.36) 210.53,-111.36 cw(c211.068,-111.36) C79.2@210.687,-110.979 ; C79.2@210.53,-110.822 210.53,-112.666 v1@211.122,-113.259 ; 210.816,-112.952 cw(c210.382,-113.386) v1@210.995,-113.386 ; v1@211.032,-113.475 cw(c210.816,-113.692) 211.122,-113.692 cw(c211.429,-113.692) v1@211.212,-113.475 ; v1(211.122,-113.386) 211.122,-115.821 213.208,-117.907 P3.12@228.016,-117.907
DI_7: C80.2 D48.1 P3.10 U17.8 | length 37.7
  Top Layer w0.254: D48.1@208.331,-112.265 cw(c207.725,-112.872) 208.582,-112.872 ; U17.8@208.389,-116.574 ccw(c207.923,-116.108) 208.582,-116.108 ccw(c209.241,-116.108) U17.8@208.775,-116.574 ; v1@208.492,-113.221 cw(c208.276,-113.438) 208.582,-113.438 cw(c208.889,-113.438) v1@208.672,-113.221 ; v1@208.492,-113.042 ccw(c208.276,-112.825) 208.582,-112.825 ccw(c208.889,-112.825) v1@208.672,-113.042 ; D48.1@208.559,-112.037 208.582,-112.06 v1(208.582,-113.132) U17.8@208.582,-116.967 ; 208.582,-112.762 cw(c209.284,-112.762) D48.1@208.788,-112.265
  Bottom Layer w0.254: C80.2@207.106,-110.979 cw(c206.726,-111.36) 207.264,-111.36 cw(c207.802,-111.36) C80.2@207.422,-110.979 ; C80.2@207.264,-110.822 207.264,-111.686 v1@208.582,-113.005 ; v1@208.492,-113.221 cw(c208.276,-113.438) 208.582,-113.438 cw(c208.889,-113.438) v1@208.672,-113.221 ; v1(208.582,-113.132) 208.582,-118.361 210.668,-120.447 P3.10@228.016,-120.447
DI_IN0: R82.2 U25.16 U44.37 | length 128.8
  Top Layer w0.254: U44.37@139.091,-186.678 163.816,-186.678 v1(164.059,-186.436) ; 163.167,-186.678 ccw(c163.167,-185.545) v1@163.969,-186.346 ; 163.78,-186.678 ccw(c163.78,-186.158) v1@164.148,-186.526 ; v1(171.044,-134.95) 187.96,-134.95 191.668,-131.242 198.724,-131.242 199.994,-129.972 203.429,-129.972 204.47,-128.93 204.47,-127.381 204.24,-127.151 R82.2@203.197,-127.151 ; v1@171.133,-135.04 cw(c171.35,-135.257) 171.35,-134.95 cw(c171.35,-134.644) v1@171.133,-134.86 ; U25.16@202.928,-123.787 cw(c202.462,-124.253) 203.121,-124.253 cw(c203.78,-124.253) U25.16@203.314,-123.787 ; R82.2@202.965,-126.993 ccw(c202.587,-126.616) 203.121,-126.616 ; R82.2@203.121,-127.075 U25.16@203.121,-123.394 ; 203.121,-126.61 ccw(c203.664,-126.61) R82.2@203.28,-126.993 ; R82.2@203.43,-127.309 cw(c203.811,-127.689) 203.811,-127.151 cw(c203.811,-126.613) R82.2@203.43,-126.993
  Bottom Layer w0.254: v1@163.969,-186.346 ccw(c163.752,-186.129) 164.059,-186.129 ccw(c164.365,-186.129) v1@164.148,-186.346 ; v1(164.059,-186.436) 164.059,-183.286 164.059,-141.503 165.176,-140.386 ; 164.389,-141.173 165.176,-140.386 ; v1@170.954,-135.04 ccw(c170.737,-135.257) 170.737,-134.95 ccw(c170.737,-134.644) v1@170.954,-134.86 ; v1(171.044,-134.95) 170.612,-134.95 165.176,-140.386
DI_IN1: R87.2 U25.14 U44.38 | length 124.3
  Top Layer w0.254: U44.38@139.091,-186.178 163.097,-186.178 ; v1@163.322,-185.953 163.097,-186.178 ; v1(163.474,-185.801) 163.097,-186.178 ; v1(171.628,-134.366) 187.731,-134.366 191.414,-130.683 198.552,-130.683 199.695,-129.54 201.397,-129.54 201.727,-129.21 201.727,-127.457 201.421,-127.151 R87.2@200.607,-127.151 ; v1@171.718,-134.456 cw(c171.934,-134.673) 171.934,-134.366 cw(c171.934,-134.059) v1@171.718,-134.276 ; U25.14@200.388,-123.787 cw(c199.922,-124.253) 200.581,-124.253 cw(c201.24,-124.253) U25.14@200.774,-123.787 ; R87.2@200.449,-126.993 ccw(c200.13,-126.674) 200.581,-126.674 ; R87.2@200.581,-127.126 U25.14@200.581,-123.394 ; 200.581,-126.551 ccw(c201.206,-126.551) R87.2@200.764,-126.993 ; R87.2@200.839,-127.309 cw(c201.22,-127.689) 201.22,-127.151 cw(c201.22,-126.613) R87.2@200.839,-126.993 ; 163.258,-186.018 cw(c163.474,-186.235) 163.474,-185.928 ccw(c163.474,-186.235) 163.258,-186.018 ; 163.258,-186.018 ccw(c163.041,-185.801) 163.347,-185.801 cw(c163.041,-185.801) 163.258,-186.018
  Bottom Layer w0.254: v1@163.385,-185.711 ccw(c163.106,-185.433) 163.5,-185.433 ; v1(163.474,-185.801) 163.5,-185.776 163.5,-183.058 163.5,-141.351 170.485,-134.366 v1(171.628,-134.366) ; v1@171.538,-134.456 ccw(c171.321,-134.673) 171.321,-134.366 ccw(c171.321,-134.059) v1@171.538,-134.276
DI_IN2: R93.2 U25.12 U44.39 | length 121
  Top Layer w0.254: U44.39@139.091,-185.678 162.505,-185.678 v1(162.992,-185.191) ; v1@162.865,-185.191 cw(c162.558,-185.191) 162.775,-185.408 cw(c162.992,-185.625) v1@162.992,-185.318 ; v1(172.39,-133.731) 187.604,-133.731 191.033,-130.302 198.323,-130.302 199.238,-129.388 199.238,-127.61 198.779,-127.151 R93.2@198.016,-127.151 ; v1@172.48,-133.821 cw(c172.696,-134.038) 172.696,-133.731 cw(c172.696,-133.424) v1@172.48,-133.641 ; U25.12@197.848,-123.787 cw(c197.382,-124.253) 198.041,-124.253 cw(c198.7,-124.253) U25.12@198.234,-123.787 ; R93.2@197.858,-126.993 ccw(c197.416,-126.551) 198.041,-126.551 ; R93.2@198.041,-127.126 U25.12@198.041,-123.394 ; 198.041,-126.674 ccw(c198.493,-126.674) R93.2@198.173,-126.993 ; R93.2@198.248,-127.309 cw(c198.629,-127.689) 198.629,-127.151 cw(c198.629,-126.613) R93.2@198.248,-126.993
  Bottom Layer w0.254: v1@162.902,-185.102 ccw(c162.685,-184.885) 162.992,-184.885 ccw(c163.298,-184.885) v1@163.082,-185.102 ; v1(162.992,-185.191) 162.992,-140.919 170.18,-133.731 v1(172.39,-133.731) ; v1@172.3,-133.821 ccw(c172.083,-134.038) 172.083,-133.731 ccw(c172.083,-133.424) v1@172.3,-133.641
DI_IN3: R97.2 U25.10 U44.40 | length 118.1
  Top Layer w0.254: U44.40@139.091,-185.178 161.837,-185.178 v1(162.433,-184.582) ; v1@162.306,-184.582 cw(c161.999,-184.582) 162.216,-184.799 cw(c162.433,-185.015) v1@162.433,-184.709 ; v1(171.679,-133.121) 187.554,-133.121 190.754,-129.921 196.113,-129.921 196.825,-129.21 196.825,-127.762 196.214,-127.151 R97.2@195.501,-127.151 U25.10@195.501,-123.394 ; v1@171.768,-133.211 cw(c171.985,-133.428) 171.985,-133.121 cw(c171.985,-132.815) v1@171.768,-133.032 ; U25.10@195.308,-123.787 cw(c194.842,-124.253) 195.501,-124.253 cw(c196.16,-124.253) U25.10@195.694,-123.787 ; R97.2@195.344,-126.993 ccw(c194.963,-126.613) 195.501,-126.613 ccw(c196.04,-126.613) R97.2@195.659,-126.993 ; R97.2@195.734,-127.309 cw(c196.115,-127.689) 196.115,-127.151 cw(c196.115,-126.613) R97.2@195.734,-126.993
  Bottom Layer w0.254: v1@162.343,-184.492 ccw(c162.126,-184.275) 162.433,-184.275 ccw(c162.74,-184.275) v1@162.523,-184.492 ; v1@162.408,-184.607 v1(162.433,-184.582) 162.433,-183.261 162.433,-140.614 169.926,-133.121 v1(171.679,-133.121) ; v1@171.589,-133.211 ccw(c171.372,-133.428) 171.372,-133.121 ccw(c171.372,-132.815) v1@171.589,-133.032
DI_IN4: R109.2 U17.16 U44.33 | length 144.4
  Top Layer w0.254: U44.33@139.091,-188.678 165.252,-188.678 ; 166.098,-188.678 165.252,-188.678 ; v1@166.395,-188.392 cw(c166.089,-188.392) 166.306,-188.609 cw(c166.522,-188.825) v1@166.522,-188.519 ; v1(166.522,-188.392) 166.236,-188.678 165.252,-188.678 ; v1(171.197,-137.616) 188.926,-137.616 192.735,-133.807 199.441,-133.807 200.965,-132.283 216.205,-132.283 218.999,-129.489 218.999,-127.559 218.591,-127.151 R109.2@217.472,-127.151 U17.16@217.472,-123.267 ; v1@171.287,-137.706 cw(c171.503,-137.923) 171.503,-137.616 cw(c171.503,-137.31) v1@171.287,-137.527 ; U17.16@217.279,-123.66 cw(c216.813,-124.126) 217.472,-124.126 cw(c218.131,-124.126) U17.16@217.665,-123.66 ; R109.2@217.315,-126.993 ccw(c216.934,-126.613) 217.472,-126.613 ccw(c218.011,-126.613) R109.2@217.63,-126.993 ; R109.2@217.705,-127.309 cw(c218.086,-127.689) 218.086,-127.151 cw(c218.086,-126.613) R109.2@217.705,-126.993
  Bottom Layer w0.254: v1@166.433,-188.302 ccw(c166.216,-188.085) 166.522,-188.085 ccw(c166.829,-188.085) v1@166.612,-188.302 ; v1(166.522,-188.392) 166.522,-142.291 v1(171.197,-137.616) ; v1@171.07,-137.616 cw(c170.763,-137.616) 170.98,-137.833 cw(c171.197,-138.05) v1@171.197,-137.743
DI_IN5: R114.2 U17.14 U44.34 | length 141.5
  Top Layer w0.254: U44.34@139.091,-188.178 165.491,-188.178 ; 165.735,-187.935 165.491,-188.178 ; v1(165.929,-187.74) 165.491,-188.178 ; v1(172.466,-136.982) 188.493,-136.982 192.354,-133.121 199.136,-133.121 200.508,-131.75 214.427,-131.75 216.459,-129.718 216.459,-127.381 216.229,-127.151 R114.2@215.059,-127.151 ; v1@172.556,-137.072 cw(c172.773,-137.289) 172.773,-136.982 cw(c172.773,-136.676) v1@172.556,-136.892 ; U17.14@214.739,-123.66 cw(c214.273,-124.126) 214.932,-124.126 cw(c215.591,-124.126) U17.14@215.125,-123.66 ; R114.2@214.827,-126.993 ccw(c214.571,-126.738) 214.932,-126.738 ; R114.2@214.932,-127.024 U17.14@214.932,-123.267 ; 214.932,-126.487 ccw(c215.648,-126.487) R114.2@215.142,-126.993 ; R114.2@215.292,-127.309 cw(c215.673,-127.689) 215.673,-127.151 cw(c215.673,-126.613) R114.2@215.292,-126.993 ; 165.713,-187.957 cw(c165.929,-188.174) 165.929,-187.867 ccw(c165.929,-188.174) 165.713,-187.957 ; 165.713,-187.957 ccw(c165.496,-187.74) 165.802,-187.74 cw(c165.496,-187.74) 165.713,-187.957
  Bottom Layer w0.254: v1@165.84,-187.65 ccw(c165.623,-187.434) 165.929,-187.434 ccw(c166.236,-187.434) v1@166.019,-187.65 ; v1(165.929,-187.74) 165.929,-141.868 170.815,-136.982 v1(172.466,-136.982) ; v1@172.376,-137.072 ccw(c172.159,-137.289) 172.159,-136.982 ccw(c172.159,-136.676) v1@172.376,-136.892
DI_IN6: R116.2 U17.12 U44.35 | length 136.5
  Top Layer w0.254: U44.35@139.091,-187.678 165.077,-187.678 v1(165.303,-187.452) ; 164.451,-187.678 ccw(c164.451,-186.599) v1@165.213,-187.362 ; 165.064,-187.678 ccw(c165.064,-187.213) v1@165.393,-187.542 ; v1(171.679,-136.22) 188.468,-136.22 192.253,-132.436 198.933,-132.436 200.228,-131.14 210.49,-131.14 211.48,-130.15 211.48,-127.533 211.863,-127.151 ; v1@171.768,-136.31 cw(c171.985,-136.527) 171.985,-136.22 cw(c171.985,-135.914) v1@171.768,-136.13 ; 211.644,-127.37 cw(c212.253,-127.98) R116.2@212.32,-127.12 ; R116.2@212.141,-127.287 ccw(c211.863,-127.502) 211.863,-127.151 ; R116.2@212.141,-127.015 cw(c211.863,-126.8) 211.863,-127.151 ; U17.12@212.199,-123.66 cw(c211.733,-124.126) 212.392,-124.126 cw(c213.051,-124.126) U17.12@212.585,-123.66 ; R116.2@212.235,-126.993 ccw(c211.854,-126.613) 212.392,-126.613 ccw(c212.931,-126.613) R116.2@212.55,-126.993 ; U17.12@212.392,-123.267 R116.2@212.392,-127.151 211.863,-127.151
  Bottom Layer w0.254: v1@165.213,-187.362 ccw(c164.997,-187.145) 165.303,-187.145 ccw(c165.61,-187.145) v1@165.393,-187.362 ; v1(165.303,-187.452) 165.303,-141.656 170.739,-136.22 v1(171.679,-136.22) ; v1@171.589,-136.31 ccw(c171.372,-136.527) 171.372,-136.22 ccw(c171.372,-135.914) v1@171.589,-136.13
DI_IN7: R118.2 U17.10 U44.36 | length 134.5
  Top Layer w0.254: U44.36@139.091,-187.178 164.332,-187.178 v1(164.668,-186.842) ; v1@164.541,-186.842 cw(c164.235,-186.842) 164.451,-187.059 cw(c164.668,-187.276) v1@164.668,-186.969 ; v1(172.441,-135.611) 188.189,-135.611 191.846,-131.953 198.552,-131.953 200.076,-130.429 210.388,-130.429 211.099,-129.718 211.099,-127.533 210.717,-127.151 R118.2@209.725,-127.151 ; v1@172.53,-135.7 cw(c172.747,-135.917) 172.747,-135.611 cw(c172.747,-135.304) v1@172.53,-135.521 ; R118.2@209.643,-126.993 ccw(c209.136,-126.487) 209.852,-126.487 ; U17.10@209.659,-123.66 cw(c209.193,-124.126) 209.852,-124.126 cw(c210.511,-124.126) U17.10@210.045,-123.66 ; R118.2@209.852,-127.024 U17.10@209.852,-123.267 ; 209.852,-126.738 ccw(c210.213,-126.738) 209.958,-126.993 ccw(c210.339,-126.613) 210.339,-127.151 ccw(c210.339,-127.689) R118.2@209.958,-127.309
  Bottom Layer w0.254: v1@164.578,-186.753 ccw(c164.362,-186.536) 164.668,-186.536 ccw(c164.975,-186.536) v1@164.758,-186.753 ; v1(164.668,-186.842) 164.668,-141.529 170.586,-135.611 v1(172.441,-135.611) ; v1@172.351,-135.7 ccw(c172.134,-135.917) 172.134,-135.611 ccw(c172.134,-135.304) v1@172.351,-135.521
DI_IN8: U44.61
DI_IN9: U44.62
DIN: U4.23 U18.12 U54.23 | length 54.7
  Top Layer w0.254: U18.12@184.732,-176.505 186.944,-176.505 187.579,-175.87 v1(189.56,-175.87) 189.96,-175.87 190.398,-176.308 198.315,-176.308 ; U18.12@185.716,-176.612 cw(c185.976,-176.873) 185.976,-176.505 cw(c185.976,-176.137) U18.12@185.716,-176.397 ; v1@189.47,-175.959 ccw(c189.254,-176.176) 189.254,-175.87 ccw(c189.254,-175.563) v1@189.47,-175.78 ; v1@189.65,-175.959 cw(c189.867,-176.176) 189.867,-175.87 cw(c189.867,-175.563) v1@189.65,-175.78 ; v1@190.932,-151.79 cw(c190.932,-152.097) 191.149,-151.88 cw(c191.365,-151.663) v1@191.059,-151.663 ; v1(190.932,-151.663) 191.237,-151.968 194.208,-151.968 ; 193.726,-151.968 194.208,-151.968 ; 198.323,-176.316 U4.23@200.095,-176.316 ; U54.23@200.603,-150.535 198.766,-150.535 197.333,-151.968 194.208,-151.968
  Bottom Layer w0.254: v1@189.47,-175.78 ccw(c189.254,-175.563) 189.56,-175.563 ccw(c189.867,-175.563) v1@189.65,-175.78 ; v1(189.56,-175.87) 189.56,-155.677 191.44,-153.797 191.44,-152.24 190.932,-151.732 v1(190.932,-151.663) ; v1@191.059,-151.663 ccw(c191.532,-151.663) 191.197,-151.998
DIN_AO: U11.9 U26.12 | length 7.6
  Top Layer w0.254: U26.12@159.001,-205.943 161.646,-205.943 162.026,-206.324 U11.9@165.449,-206.324 ; U26.12@159.985,-206.051 cw(c160.246,-206.311) 160.246,-205.943 cw(c160.246,-205.575) U26.12@159.985,-205.835 ; U11.9@164.88,-206.393 ccw(c164.712,-206.56) 164.712,-206.324 ccw(c164.712,-206.087) U11.9@164.88,-206.254
DM: R10.2 U13.3 | length 31.7
  Top Layer w0.254: 143.916,-109.677 ccw(c143.614,-109.374) R10.2@143.992,-109.174 ; R10.2@144.038,-109.229 cw(c143.866,-109.449) 144.145,-109.449 ; R10.2@144.145,-109.093 144.145,-109.449 ; 144.16,-109.434 ccw(c143.932,-109.206) R10.2@144.217,-109.055 ; R10.2@144.252,-109.229 ccw(c144.424,-109.449) 144.145,-109.449 ; U13.3@146.828,-136.116 ccw(c146.49,-135.778) 146.968,-135.778 ccw(c147.446,-135.778) U13.3@147.108,-136.116 ; U13.3@146.968,-137.081 146.968,-135.433 146.279,-134.744 146.279,-122.651 143.739,-120.111 143.739,-109.855 144.145,-109.449
DO_0: C90.1 D49.1 K1.5 U46.4 | length 16.8
  Top Layer w0.762: v2@210.298,-238.176 U46.4@208.649,-238.176 208.649,-239.51 212.019,-242.88 K1.5@212.019,-245.567 ; K1.5@211.758,-245.306 ccw(c211.128,-244.676) 212.019,-244.676 ccw(c212.91,-244.676) K1.5@212.28,-245.306
  Bottom Layer w0.762: D49.1@209.452,-237.899 cw(c211.048,-237.845) 209.919,-236.715 ; C90.1@209.919,-235.788 209.919,-236.715 ; v2(210.404,-238.201) D49.1@209.383,-238.201 209.383,-237.251 209.919,-236.715
DO_1: C88.1 D51.1 K4.5 U20.4 | length 16.4
  Top Layer w0.762: v2@185.428,-238.176 U20.4@183.779,-238.176 183.779,-239.684 186.623,-242.529 K4.5@186.623,-245.567 ; K4.5@186.362,-245.306 ccw(c185.732,-244.676) 186.623,-244.676 ccw(c187.514,-244.676) K4.5@186.884,-245.306
  Bottom Layer w0.762: D51.1@184.568,-237.901 cw(c185.897,-237.901) 184.957,-236.962 ; C88.1@185.162,-235.788 185.162,-236.757 184.499,-237.42 D51.1@184.499,-238.201 v2(185.521,-238.201)
DO_2: C91.1 D53.1 K7.5 U23.4 | length 15.4
  Top Layer w0.762: v2@198.395,-238.176 U23.4@196.745,-238.176 196.745,-239.722 199.321,-242.298 K7.5@199.321,-245.567 ; K7.5@199.06,-245.306 ccw(c198.43,-244.676) 199.321,-244.676 ccw(c200.212,-244.676) K7.5@199.582,-245.306
  Bottom Layer w0.762: v2(198.474,-238.201) D53.1@197.453,-238.201 197.453,-237.751 198.497,-236.707 C91.1@198.497,-235.788
DO_3: C93.1 D55.1 K10.5 U29.4 | length 16.1
  Top Layer w0.762: v2@172.681,-238.176 U29.4@171.031,-238.176 171.031,-239.916 173.926,-242.81 K10.5@173.926,-245.567 ; K10.5@173.665,-245.306 ccw(c173.035,-244.676) 173.926,-244.676 ccw(c174.816,-244.676) K10.5@174.187,-245.306
  Bottom Layer w0.508: D55.1@171.587,-237.763 ccw(c171.252,-237.428) 171.725,-237.428 ccw(c172.198,-237.428) D55.1@171.864,-237.763 ; D55.1@171.725,-238.201 171.725,-237.189 172.388,-236.526 C93.1@172.388,-235.788
  Bottom Layer w0.762: D55.1@171.725,-238.201 v2(172.746,-238.201)
DO_4: C95.1 D57.1 K13.5 U31.4 | length 15.9
  Top Layer w0.762: v2@160.119,-238.176 U31.4@158.47,-238.176 158.47,-239.648 161.228,-242.406 K13.5@161.228,-245.567 ; K13.5@160.967,-245.306 ccw(c160.337,-244.676) 161.228,-244.676 ccw(c162.119,-244.676) K13.5@161.489,-245.306
  Bottom Layer w0.508: D57.1@159.012,-237.763 ccw(c158.677,-237.428) 159.15,-237.428 ccw(c159.623,-237.428) D57.1@159.289,-237.763 ; D57.1@159.15,-238.201 159.15,-237.166 159.559,-236.757 C95.1@159.559,-235.788
  Bottom Layer w0.762: D57.1@159.15,-238.201 v2(160.171,-238.201)
DO_5: C98.1 D59.1 K15.5 U33.4 | length 15.1
  Top Layer w0.762: v2@147.59,-238.176 U33.4@145.941,-238.176 145.941,-240.479 148.53,-243.069 K15.5@148.53,-245.567 ; K15.5@148.269,-245.306 ccw(c147.639,-244.676) 148.53,-244.676 ccw(c149.421,-244.676) K15.5@148.791,-245.306
  Bottom Layer w0.762: C98.1@147.017,-235.788 147.017,-236.574 146.608,-236.983 D59.1@146.608,-238.201 v2(147.629,-238.201)
DO_6: C102.1 D61.1 K17.5 U35.4 | length 16.7
  Top Layer w0.762: U35.4@133.147,-238.176 133.147,-239.853 135.832,-242.538 K17.5@135.832,-245.567 ; U35.4@133.173,-238.201 v2(134.822,-238.201) ; K17.5@135.571,-245.306 ccw(c134.942,-244.676) 135.832,-244.676 ccw(c136.723,-244.676) K17.5@136.093,-245.306
  Bottom Layer w0.762: D61.1@133.87,-237.901 cw(c135.628,-237.901) 134.385,-236.658 ; C102.1@134.591,-235.788 134.591,-236.452 133.801,-237.242 D61.1@133.801,-238.201 v2(134.822,-238.201)
DO_7: C104.1 D63.1 K19.5 U37.4 | length 16.8
  Top Layer w0.762: v2@122.148,-238.176 U37.4@120.511,-238.176 120.511,-240.145 123.135,-242.769 K19.5@123.135,-245.567 ; K19.5@122.874,-245.306 ccw(c122.244,-244.676) 123.135,-244.676 ccw(c124.026,-244.676) K19.5@123.396,-245.306
  Bottom Layer w0.508: D63.1@121.013,-237.763 ccw(c120.679,-237.428) 121.152,-237.428 ccw(c121.625,-237.428) D63.1@121.29,-237.763 ; D63.1@121.152,-238.201 121.152,-236.861 121.815,-236.198 C104.1@121.815,-235.788 ; 121.414,-236.599 ccw(c120.678,-235.863) C104.1@121.719,-235.863
  Bottom Layer w0.762: D63.1@121.152,-238.201 v2(122.173,-238.201)
DO_8: C106.1 D64.1 K3.5 U38.4 | length 15.1
  Top Layer w0.762: U38.4@107.901,-238.176 107.901,-239.448 110.437,-241.984 K3.5@110.437,-245.567 ; U38.4@107.926,-238.201 v2(109.549,-238.201) ; K3.5@110.176,-245.306 ccw(c109.546,-244.676) 110.437,-244.676 ccw(c111.328,-244.676) K3.5@110.698,-245.306
  Bottom Layer w0.762: C106.1@109.064,-235.788 109.064,-236.503 108.528,-237.039 D64.1@108.528,-238.201 v2(109.549,-238.201)
DO_9: C107.1 D65.1 K6.5 U39.4 | length 15
  Top Layer w0.762: U39.4@95.646,-238.176 95.646,-239.766 97.739,-241.859 K6.5@97.739,-245.567 ; U39.4@95.671,-238.201 v2(97.281,-238.201) ; K6.5@97.478,-245.306 ccw(c96.848,-244.676) 97.739,-244.676 ccw(c98.63,-244.676) K6.5@98,-245.306
  Bottom Layer w0.762: C107.1@96.923,-235.788 96.923,-236.503 96.26,-237.166 D65.1@96.26,-238.201 v2(97.281,-238.201)